# Altium PCB cdemu_ksm440aem.PcbDoc
Units mm, origin at the board's own origin, x right, y up, seen from the top; angles counter-clockwise.
Board outline 152.4 x 101.6 mm, 2 copper layers (Top Layer, Bottom Layer); 19 components, 23 nets, 156 pads, 0 vias.
Unrouted connection lines stored in the file: 53.
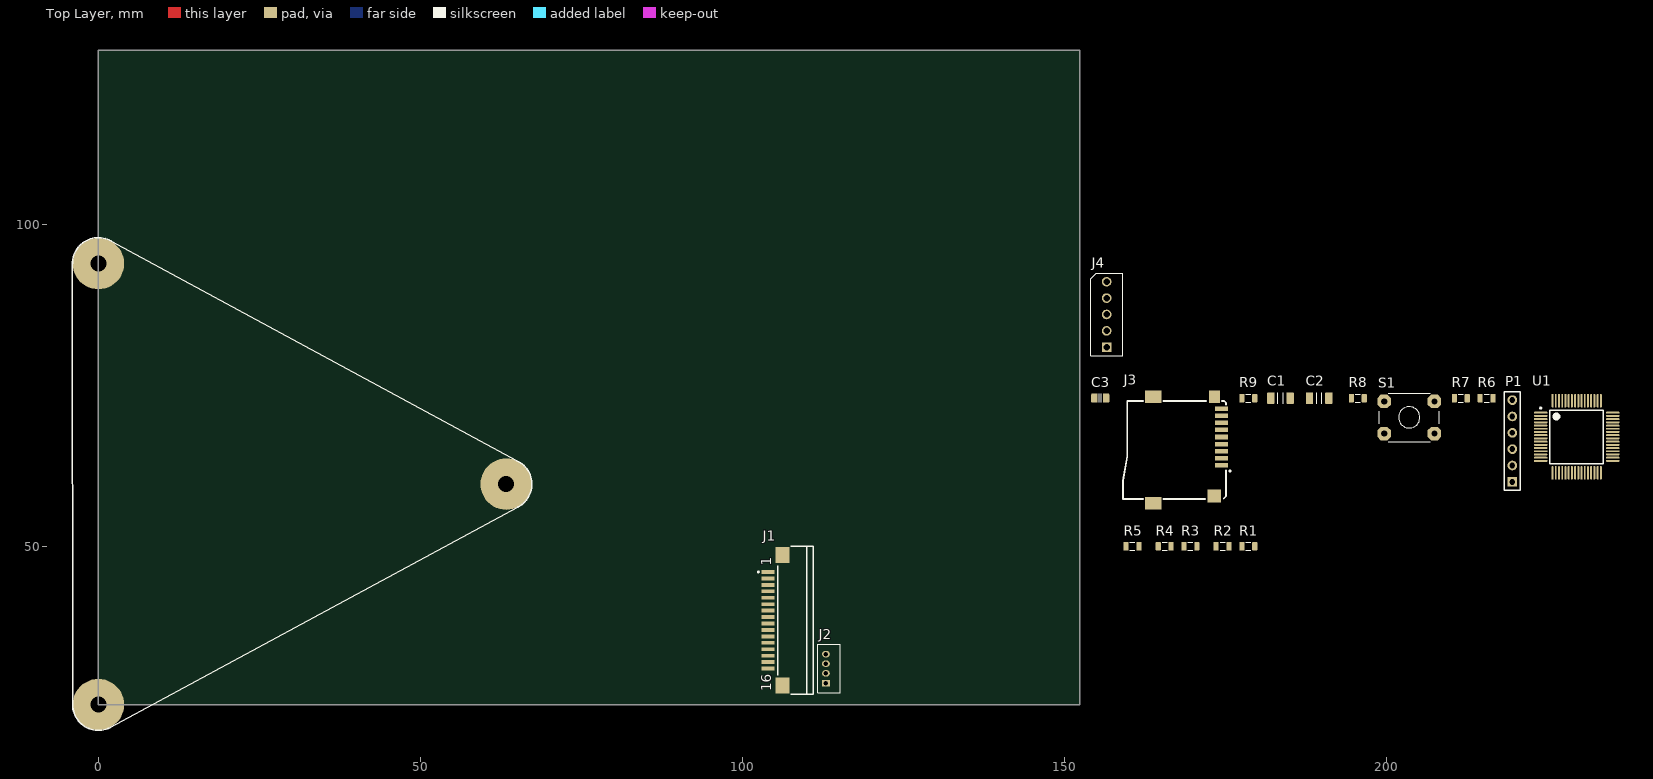
[diagram p0: Top Layer view]
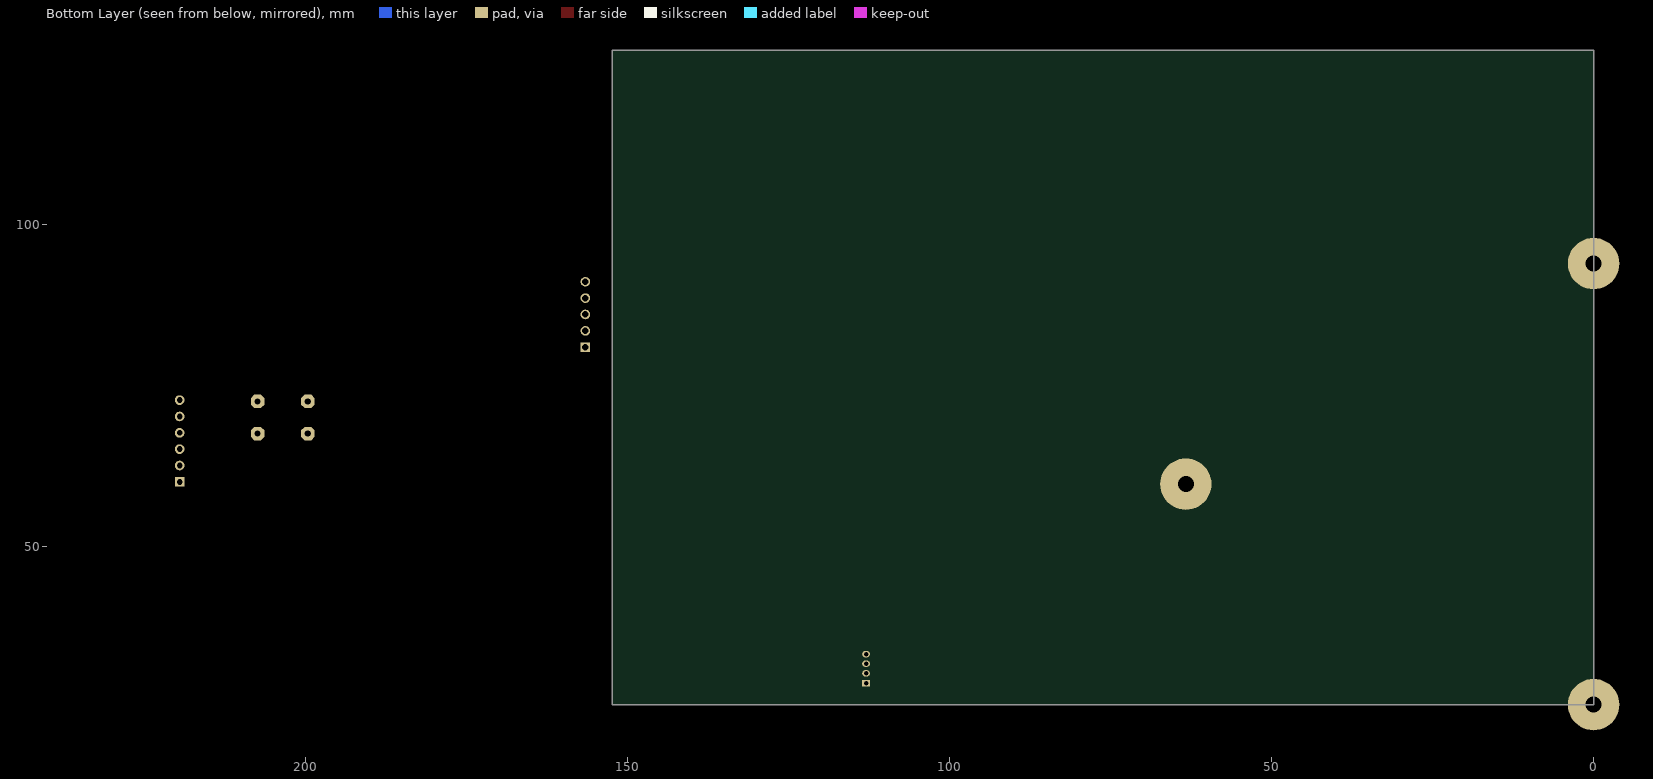
[diagram p1: Bottom Layer view, seen from below]

## Layer stack, top to bottom
Top Layer: signal copper 0.0356
Dielectric: dielectric 0.32, FR-4, Dk 4.8
Bottom Layer: signal copper 0.0356

## Board outline
0,25.4 152.4,25.4 152.4,127 0,127

## Design rules (kind name [scope] priority, off if disabled: settings)
Clearance [All] p1: gap=0.254
PolygonConnect [All] p1: connectstyle=Relief reliefconductorwidth=0.254 reliefentries=4 polygonreliefangle="90 Angle"
RoutingVias [All] p1: holewidth=0.711 width=1.27 viastyle="Through Hole" minholewidth=0.711 minwidth=1.27 maxholewidth=0.711 maxwidth=1.27
SilkscreenOverComponentPads [All] p1: minsilkscreentomaskgap=0.254
SolderMaskExpansion [All] p1: expansion=0.102
Width [All] p1: maxlimit=0.254 minlimit=0.254 preferedwidth=0.254
27 further rules are at their usual default settings.

## Classes and differential pairs
component class cd_interface: J1 J2 R1 R2 R3 R4 R5
component class mcu: C1 C2 C3 J3 P1 R6 R7 R8 R9 S1 U1
component class power_supply: J4
net class SDIO: SD_CLK SD_CMD SD_DAT0 SD_DAT1 SD_DAT2 SD_DAT3

## Components (designator, comment, footprint, x,y, rotation, side; value= is the part's Value field where it differs from the comment)
C1 "approved sub OK" CAPC3216X180N 183.6,73 r0 top
C2 "approved sub OK" CAPC3216X180N 189.6,73 r0 top
C3 "0805" CAPC2012X135N 155.6,73 r0 top
J1 "Laser head" FPC16_1mm_top 104,46 r270 top
J2 "Motors" 64800411622 113,31 r90 top
J3 "MicroSD Slot" "MICROSD Slot" 174.6,69 r0 top
J4 "66100511622" 66100511622 156.6,86 r90 top
P1 "SWD" HDR1X6 219.6,60 r90 top
R1 "0805" RESC2012N_ZERO 178.6,50 r0 top
R2 "0805" RESC2012N_ZERO 174.6,50 r0 top
R3 "0805" RESC2012N_ZERO 169.6,50 r0 top
R4 "0805" RESC2012N_ZERO 165.6,50 r0 top
R5 "0805" RESC2012N_ZERO 160.6,50 r0 top
R6 "0805" RESC2012N_ZERO 215.6,73 r0 top
R7 "0805" RESC2012N_ZERO 211.6,73 r0 top
R8 "0805" RESC2012N_ZERO 195.6,73 r0 top
R9 "0805" RESC2012N_ZERO 178.6,73 r0 top
S1 "BOOT" TACT-SWITCH-TC-37XB 203.6,70 r0 top
U1 "STM32F405RGT6" STM-LQFP64_M 229.6,67 r0 top

## Footprints (in the part's own frame and the unit in brackets; to place one, negate y for a bottom-side part, rotate by r counter-clockwise, add the part's x,y. Pads: shape width x height; smd on the part's side, far side on the other; paste and mask are expansions set on the pad)
64800411622 [mm] "4 pins, straight"
  rect 1x1.2 hole 0.7: 1(-2.25,0)
  oval 1x1.2 hole 0.7: 2(-0.75,0) 3(0.75,0) 4(2.25,0)
  silkscreen extent -3.75,-2.2 3.75,1.3, body extent -3.75,-2.2 3.75,1.3, height 4.51
66100511622 [mm] "5 pins, Straight"
  rect 1.5x1.5 hole 1: 1(-5.08,0)
  round 1.5 hole 1: 2(-2.54,0) 3(0,0) 4(2.54,0) 5(5.08,0)
  silkscreen extent -6.41,-2.5 6.41,2.5, body extent -6.2,-2.54 6.2,2.46, height 11.3
CAPC2012X135N [mm] "Chip Capacitor, Body 2.0x1.2mm, EIA 0805, IPC Medium Density"
  round 0.254 on Mech15: 0(0,0)
  rrect25% 1x1.4 smd: 1(-0.9,0) 2(0.9,0)
  Top Layer pour cut-out: -0.675,0.7 -0.475,0.9 0.475,0.9 0.675,0.7 0.675,-0.7 0.475,-0.9 -0.475,-0.9 -0.675,-0.7
  silkscreen extent -0.15,-0.65 0.15,0.65, body extent -1.1,-0.72 1.1,0.73, height 1.34
CAPC3216X180N [mm] "Chip Capacitor, Body 3.2x1.6mm, 1.8mm H, EIA 1206, IPC Medium Density"
  round 0.508 on Mech15: 0(0,0)
  rrect25% 1.15x1.8 smd: 1(-1.5,0) 2(1.5,0)
  silkscreen extent -0.4,-0.88 0.4,0.88, body extent -1.7,-0.9 1.7,0.9, height 1.8
FPC16_1mm_top [mm]
  rect 0.6x2 smd: 1(0,0) 2(1,0) 3(2,0) 4(3,0) 5(4,0) 6(5,0) 7(6,0) 8(7,0) 9(8,0) 10(9,0) 11(10,0) 12(11,0) 13(12,0) 14(13,0) 15(14,0) 16(15,0)
  rect 2.5x2.2 smd: 17(-2.65,2.25) 18(17.65,2.25)
  silkscreen extent -4,-1.6 19,7
HDR1X6 [mm] "Connector; Header; 6 Position"
  rect 1.5x1.5 hole 0.9: 1(0,0)
  round 1.5 hole 0.9: 2(2.54,0) 3(5.08,0) 4(7.62,0) 5(10.16,0) 6(12.7,0)
  silkscreen extent -1.27,-1.27 13.97,1.27
"MICROSD Slot" [mil]
  rect 80x28 smd: 1(-6,-253.47) 2(-6,-210.16) 3(-6,-166.85) 4(-6,-123.55) 5(-6,-80.24) 6(-6,-36.93) 7(-6,6.38) 8(-6,49.68) 9(-6,92.99)
  rect 98.43x78.74 smd: 10(-424.01,-485) 13(-424.01,166)
  rect 83x78.74 smd: 11(-50,-439.8)
  rect 67x78.74 smd: 12(-50,166)
  round 23.62 hole 40 unplated: MH1(-436.89,25) MH2(-436,-289.96)
  silkscreen extent -609,-459 50,140, body extent -611,-460 21,140, height 67
RESC2012N_ZERO [mm] "Chip Resistor, Body 2.0x1.2mm, 0805, IPC Medium Density"
  round 0.254 on Mech15: 0(0,0)
  rrect25% 0.8x1.3 smd: 1(-1,0) 2(1,0)
  Top Layer pour cut-out: -0.725,0.65 -0.525,0.85 0.525,0.85 0.725,0.65 0.725,-0.65 0.525,-0.85 -0.525,-0.85 -0.725,-0.65
  silkscreen extent -0.38,-0.64 0.38,0.64, body extent -1.1,-0.67 1.1,0.68, height 0.69
STM-LQFP64_M [mm] "Thin QFP, 64-Leads, Body 10x10mm, Pitch 0.5mm, IPC Low Density"
  oval 2.1x0.3 smd: 1(-5.6,3.75) 2(-5.6,3.25) 3(-5.6,2.75) 4(-5.6,2.25) 5(-5.6,1.75) 6(-5.6,1.25) 7(-5.6,0.75) 8(-5.6,0.25) 9(-5.6,-0.25) 10(-5.6,-0.75) 11(-5.6,-1.25) 12(-5.6,-1.75) 13(-5.6,-2.25) 14(-5.6,-2.75) 15(-5.6,-3.25) 16(-5.6,-3.75) 33(5.6,-3.75) 34(5.6,-3.25) 35(5.6,-2.75) 36(5.6,-2.25) 37(5.6,-1.75) 38(5.6,-1.25) 39(5.6,-0.75) 40(5.6,-0.25) 41(5.6,0.25) 42(5.6,0.75) 43(5.6,1.25) 44(5.6,1.75) 45(5.6,2.25) 46(5.6,2.75) 47(5.6,3.25) 48(5.6,3.75)
  oval 0.3x2.1 smd: 17(-3.75,-5.6) 18(-3.25,-5.6) 19(-2.75,-5.6) 20(-2.25,-5.6) 21(-1.75,-5.6) 22(-1.25,-5.6) 23(-0.75,-5.6) 24(-0.25,-5.6) 25(0.25,-5.6) 26(0.75,-5.6) 27(1.25,-5.6) 28(1.75,-5.6) 29(2.25,-5.6) 30(2.75,-5.6) 31(3.25,-5.6) 32(3.75,-5.6) 49(3.75,5.6) 50(3.25,5.6) 51(2.75,5.6) 52(2.25,5.6) 53(1.75,5.6) 54(1.25,5.6) 55(0.75,5.6) 56(0.25,5.6) 57(-0.25,5.6) 58(-0.75,5.6) 59(-1.25,5.6) 60(-1.75,5.6) 61(-2.25,5.6) 62(-2.75,5.6) 63(-3.25,5.6) 64(-3.75,5.6)
  silkscreen extent -5.72,-4.15 4.15,4.57, body extent -5,-5 5,5, height 1.6
TACT-SWITCH-TC-37XB [mm] "Wealth Metal sealed TH tact switch"
  round 0.508 on Mech15: 0(0,0)
  oct 2.1x2.1 hole 0.965: 1(-3.9,-2.5) 1(3.9,-2.5) 2(-3.9,2.5) 2(3.9,2.5)
  silkscreen extent -4.67,-3.79 4.67,3.79, body extent -4.46,-3.6 4.46,3.6, height 5

## Part data
C1 C2: library part CAPC_10u_1206_16V, "Capacitor SMD Cer 10uF 10% 16V X7R 1206"
C3: library part CAPC_1u_0805_X7R_16V_10%, "Capacitor SMD Cer X7R 0805"
J1: library part CL586-0536-8, "FH12 Series, \"Flip-Lock\" SMT/ZIF FFC/FPC Connector - 1.0mm Spaced Bottom Standard Contact"
J2: library part "WE-1.50mm Pitch 64800411622", "WR-WTB 1.50mm Male Shrouded Header"
J4: library part "WE-2.54 mm Pitch 66100511622", "WR-WTB 2.54mm Shrouded Header_Straight"
P1: library part "Header 6", "Header, 6-Pin"
R1 R2 R3 R4 R5 R6 R7 R8 R9: library part RES_0R_0805, "Resistor SMD chip 0.0 Ohm 0.125W 0805"
S1: library part SW_THT_PB_5.0mm, "Switch, tact, 5.0mm stem"
U1: "ARM Cortex-M4 32-bit MCU+FPU, 210 DMIPS, 1024 kB Flash, 192 kB Internal RAM, 51 I/Os, 64-pin LQFP, -40 to 85 degC, Tray"

## Free pads (board coordinates)
  round 8 hole 2.5: 0(0,25.4) 0(0,93.9) 0(63.33,59.65)

## Nets (pads, with @x,y where several pads share a name; then routed paths per layer and width w, separated by ;. In a path a pad name is that pad's centre, name@x,y a point inside that pad or via, vN(x,y) a via of type N, cw(c..) or ccw(c..) an arc to the next point about the centre after c; other vN are vias at no path point)
+3,3V: J3.4 P1.1 R7.1 R9.2 S1.2 U1.1 U1.13 U1.19 U1.32 U1.48 U1.64
BOOT0: R8.2 S1.1 U1.60
GND: C1.1 C2.1 J1.11 J1.17 J1.18 J3.6 J3.10 J3.11 J3.12 J3.13 P1.3 R6.1 R8.1 U1.12 U1.18 U1.63
NetC1_2: C1.2 U1.47
NetC2_2: C2.2 U1.31
NetJ1_4: J1.4 R1.2
NetJ1_6: J1.6 R2.2
NetJ1_7: J1.7 R3.2
NetJ1_8: J1.8 R4.2
NetJ1_12: J1.12 R5.2
NetR5_1: R5.1
NetR6_2: R6.2 U1.28
NRST: P1.5 R7.2 U1.7
SD_CLK: J3.5 U1.53
SD_CMD: J3.3 U1.54
SD_DAT0: J3.7 U1.39
SD_DAT1: J3.8 U1.40
SD_DAT2: J3.1 U1.51
SD_DAT3: J3.2 U1.52
SD_DETECT: J3.9 R9.1 U1.2
SWCLK: P1.2 U1.49
SWDIO: P1.4 U1.46
VC: J1.3 R1.1 R2.1 R3.1 R4.1
pads on no net: C1.0 C2.0 C3.0 C3.1 C3.2 J1.1 J1.2 J1.5 J1.9 J1.10 J1.13 J1.14 J1.15 J1.16 J2.1 J2.2 J2.3 J2.4 J3.MH1 J3.MH2 J4.1 J4.2 J4.3 J4.4 J4.5 P1.6 R1.0 R2.0 R3.0 R4.0 R5.0 R6.0 R7.0 R8.0 R9.0 S1.0 U1.3 U1.4 U1.5 U1.6 U1.8 U1.9 U1.10 U1.11 U1.14 U1.15 U1.16 U1.17 U1.20 U1.21 U1.22 U1.23 U1.24 U1.25 U1.26 U1.27 U1.29 U1.30 U1.33 U1.34 U1.35 U1.36 U1.37 U1.38 U1.41 U1.42 U1.43 U1.44 U1.45 U1.50 U1.55 U1.56 U1.57 U1.58 U1.59 U1.61 U1.62

## Silkscreen, mask and mechanical layers (free items; w line width, h text height)
Top Overlay:
  lines w0.203: -4.031,93.9 -4,25.4 ; 1.789,21.822 65.158,56.092 ; 2,97.4 64.957,63.304
  lines w0.254: -4.031,93.9 cw(c0,93.9) 2,97.4 ; -4,25.4 ccw(c0,25.4) 1.789,21.822 ; 64.957,63.304 cw(c63.33,59.65) 65.158,56.092

## Text inside footprints (layer, text, board x,y; h text height)
J1: Top Overlay "16" at 104.5,27.5 h1.52 r90; Top Overlay "1" at 104.5,47 h1.52 r90
J3: Mechanical 1 "PCB Edge" at 159.97,59.475 h0.25 r270